# Altium PCB STM32F030C8T6.PcbDoc (part 2 of 2)
Units mil, origin at the board's own origin, x right, y up, seen from the top; angles counter-clockwise.
Board outline 2425 x 2425 mil, 2 copper layers (Top Layer, Bottom Layer); 23 components, 16 nets, 125 pads, 8 vias.
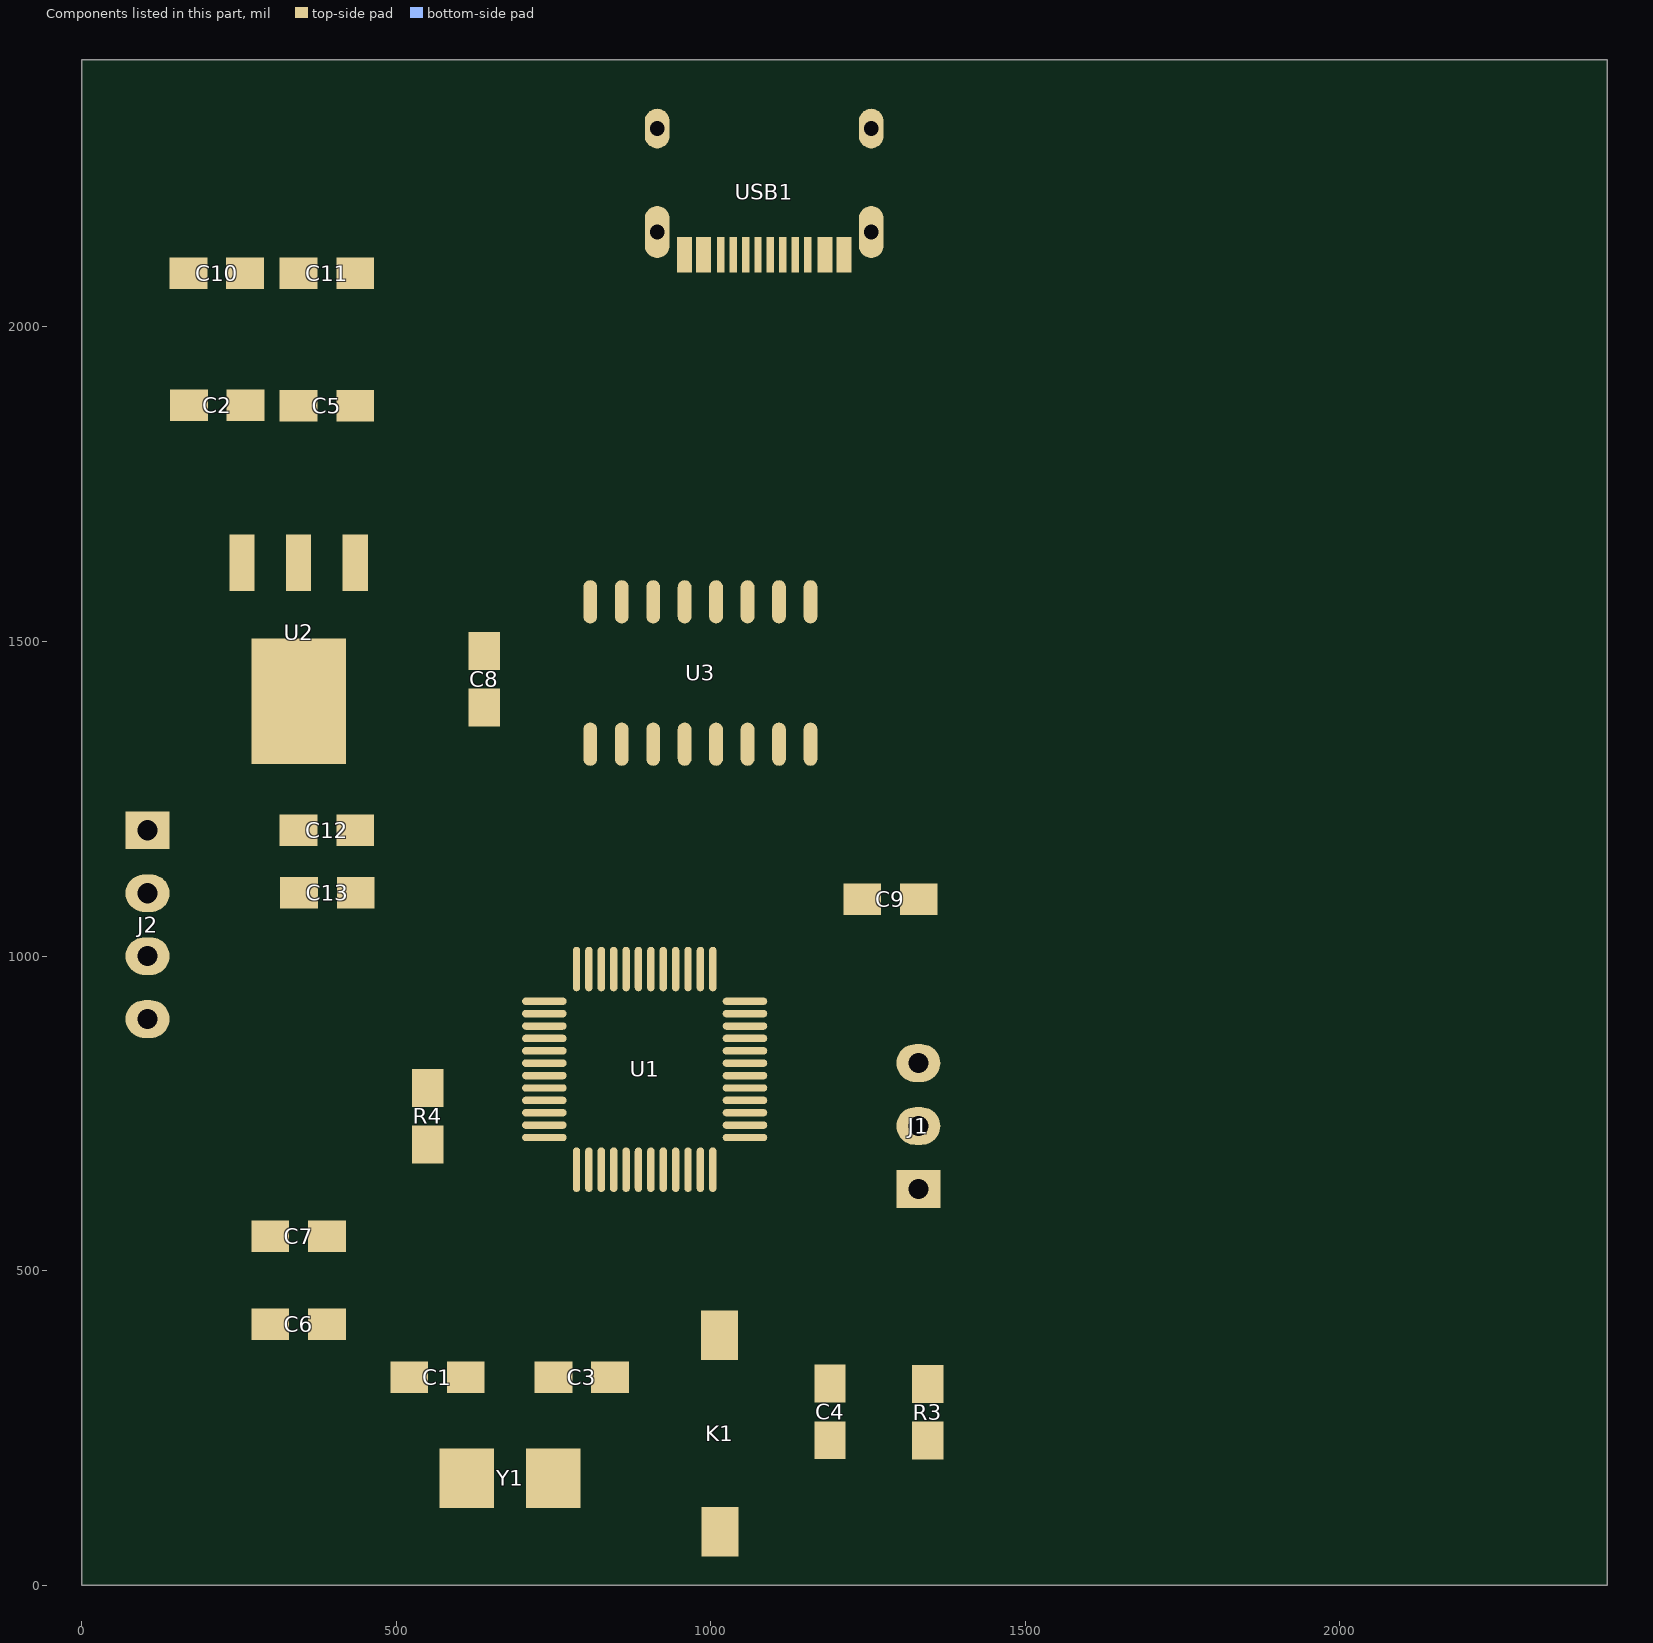
[diagram p2: the components of this part, seen from the top]

## Via types
v1: diameter 50, hole 28, Top Layer to Bottom Layer, 6 vias
v2: diameter 30, hole 20, Top Layer to Bottom Layer, 2 vias

## Nets (pads, with @x,y where several pads share a name; then routed paths per layer and width w, separated by ;. In a path a pad name is that pad's centre, name@x,y a point inside that pad or via, vN(x,y) a via of type N, cw(c..) or ccw(c..) an arc to the next point about the centre after c; other vN are vias at no path point) (continued)
copper on no net: | length 18886
  Top Layer w1: 1893,1101 1893,1104 ; 1893,1254 1893,1257 ; 1894,826 1894,852 ; 1894,1095 1894,1109 ; 1894,1251 1894,1259 ; 1894,1372 1894,1402 ; 1895,826 1895,858 ; 1895,1092 1895,1112 ; 1895,1118 1895,1121 ; 1895,1128 1895,1143 ; 1895,1251 1895,1260 ; 1895,1372 1895,1407 ; 1896,826 1896,861 ; 1896,1090 1896,1101 ; 1896,1105 1896,1114 ; 1896,1117 1896,1121 ; 1896,1128 1896,1143 ; 1896,1250 1896,1261 ; 1896,1372 1896,1409 ; 1897,831 1897,848 ; 1897,853 1897,864 ; 1897,1088 1897,1098 ; 1897,1108 1897,1121 ; 1897,1131 1897,1143 ; 1897,1250 1897,1261 ; 1897,1377 1897,1393 ; 1897,1397 1897,1411 ; 1898,832 1898,846 ; 1898,856 1898,865 ; 1898,1087 1898,1096 ; 1898,1110 1898,1121 ; 1898,1133 1898,1143 ; 1898,1250 1898,1261 ; 1898,1378 1898,1391 ; 1898,1399 1898,1412 ; 1899,832 1899,845 ; 1899,857 1899,867 ; 1899,1086 1899,1095 ; 1899,1111 1899,1121 ; 1899,1133 1899,1143 ; 1899,1250 1899,1261 ; 1899,1378 1899,1390 ; 1899,1400 1899,1413 ; 1900,833 1900,844 ; 1900,858 1900,868 ; 1900,1084 1900,1094 ; 1900,1112 1900,1121 ; 1900,1133 1900,1143 ; 1900,1250 1900,1261 ; 1900,1379 1900,1390 ; 1900,1401 1900,1414 ; 1901,833 1901,844 ; 1901,859 1901,869 ; 1901,1084 1901,1093 ; 1901,1113 1901,1121 ; 1901,1133 1901,1143 ; 1901,1250 1901,1261 ; 1901,1379 1901,1390 ; 1901,1402 1901,1414 ; 1902,833 1902,844 ; 1902,860 1902,870 ; 1902,1083 1902,1093 ; 1902,1114 1902,1121 ; 1902,1133 1902,1143 ; 1902,1251 1902,1260 ; 1902,1379 1902,1390 ; 1902,1402 1902,1415 ; 1903,833 1903,844 ; 1903,860 1903,871 ; 1903,1082 1903,1092 ; 1903,1115 1903,1121 ; 1903,1133 1903,1143 ; 1903,1252 1903,1259 ; 1903,1379 1903,1390 ; 1903,1403 1903,1415 ; 1904,833 1904,844 ; 1904,861 1904,872 ; 1904,1081 1904,1092 ; 1904,1116 1904,1121 ; 1904,1133 1904,1143 ; 1904,1254 1904,1257 ; 1904,1379 1904,1390 ; 1904,1403 1904,1415 ; 1905,833 1905,844 ; 1905,861 1905,872 ; 1905,1081 1905,1092 ; 1905,1116 1905,1121 ; 1905,1133 1905,1143 ; 1905,1340 1905,1348 ; 1905,1379 1905,1390 ; 1905,1403 1905,1415 ; 1906,833 1906,844 ; 1906,861 1906,873 ; 1906,1080 1906,1091 ; 1906,1117 1906,1121 ; 1906,1133 1906,1143 ; 1906,1339 1906,1349 ; 1906,1379 1906,1390 ; 1906,1403 1906,1415 ; 1907,833 1907,844 ; 1907,862 1907,874 ; 1907,1080 1907,1091 ; 1907,1117 1907,1121 ; 1907,1133 1907,1143 ; 1907,1338 1907,1349 ; 1907,1379 1907,1390 ; 1907,1403 1907,1415 ; 1908,833 1908,844 ; 1908,862 1908,874 ; 1908,1079 1908,1091 ; 1908,1118 1908,1121 ; 1908,1133 1908,1143 ; 1908,1338 1908,1341 ; 1908,1343 1908,1350 ; 1908,1379 1908,1390 ; 1908,1403 1908,1415 ; 1909,833 1909,844 ; 1909,862 1909,874 ; 1909,902 1909,908 ; 1909,930 1909,937 ; 1909,966 1909,976 ; 1909,1015 1909,1021 ; 1909,1033 1909,1040 ; 1909,1079 1909,1090 ; 1909,1118 1909,1121 ; 1909,1133 1909,1143 ; 1909,1150 1909,1156 ; 1909,1183 1909,1193 ; 1909,1222 1909,1229 ; 1909,1292 1909,1299 ; 1909,1326 1909,1335 ; 1909,1337 1909,1341 ; 1909,1342 1909,1350 ; 1909,1379 1909,1390 ; 1909,1403 1909,1415 ; 1909,1439 1909,1446 ; 1910,833 1910,844 ; 1910,863 1910,875 ; 1910,880 1910,895 ; 1910,900 1910,910 ; 1910,926 1910,940 ; 1910,962 1910,979 ; 1910,993 1910,1008 ; 1910,1012 1910,1023 ; 1910,1031 1910,1043 ; 1910,1079 1910,1090 ; 1910,1118 1910,1121 ; 1910,1133 1910,1143 ; 1910,1147 1910,1159 ; 1910,1179 1910,1197 ; 1910,1219 1910,1232 ; 1910,1236 1910,1239 ; 1910,1245 1910,1261 ; 1910,1269 1910,1284 ; 1910,1289 1910,1301 ; 1910,1322 1910,1340 ; 1910,1342 1910,1349 ; 1910,1379 1910,1390 ; 1910,1403 1910,1414 ; 1910,1435 1910,1450 ; 1910,1465 1910,1485 ; 1910,1489 1910,1503 ; 1911,833 1911,844 ; 1911,863 1911,875 ; 1911,880 1911,895 ; 1911,899 1911,910 ; 1911,924 1911,931 ; 1911,933 1911,942 ; 1911,960 1911,981 ; 1911,993 1911,1008 ; 1911,1011 1911,1025 ; 1911,1029 1911,1044 ; 1911,1078 1911,1090 ; 1911,1119 1911,1121 ; 1911,1133 1911,1143 ; 1911,1146 1911,1160 ; 1911,1177 1911,1199 ; 1911,1217 1911,1225 ; 1911,1226 1911,1239 ; 1911,1245 1911,1261 ; 1911,1269 1911,1284 ; 1911,1288 1911,1303 ; 1911,1320 1911,1340 ; 1911,1343 1911,1349 ; 1911,1379 1911,1390 ; 1911,1402 1911,1414 ; 1911,1433 1911,1441 ; 1911,1444 1911,1452 ; 1911,1465 1911,1485 ; 1911,1489 1911,1503 ; 1912,833 1912,844 ; 1912,863 1912,875 ; 1912,882 1912,895 ; 1912,898 1912,911 ; 1912,922 1912,929 ; 1912,935 1912,943 ; 1912,958 1912,964 ; 1912,971 1912,982 ; 1912,995 1912,1008 ; 1912,1010 1912,1014 ; 1912,1016 1912,1026 ; 1912,1028 1912,1034 ; 1912,1035 1912,1045 ; 1912,1078 1912,1090 ; 1912,1133 1912,1143 ; 1912,1145 1912,1149 ; 1912,1150 1912,1161 ; 1912,1176 1912,1181 ; 1912,1188 1912,1200 ; 1912,1215 1912,1222 ; 1912,1230 1912,1239 ; 1912,1247 1912,1261 ; 1912,1271 1912,1284 ; 1912,1286 1912,1292 ; 1912,1293 1912,1303 ; 1912,1319 1912,1327 ; 1912,1333 1912,1341 ; 1912,1344 1912,1347 ; 1912,1379 1912,1390 ; 1912,1402 1912,1413 ; 1912,1431 1912,1440 ; 1912,1446 1912,1454 ; 1912,1466 1912,1482 ; 1912,1492 1912,1501 ; 1913,833 1913,844 ; 1913,863 1913,875 ; 1913,884 1913,895 ; 1913,897 1913,901 ; 1913,902 1913,911 ; 1913,921 1913,928 ; 1913,936 1913,944 ; 1913,958 1913,963 ; 1913,972 1913,983 ; 1913,998 1913,1012 ; 1913,1017 1913,1026 ; 1913,1028 1913,1031 ; 1913,1036 1913,1046 ; 1913,1078 1913,1090 ; 1913,1133 1913,1147 ; 1913,1152 1913,1162 ; 1913,1175 1913,1180 ; 1913,1189 1913,1200 ; 1913,1214 1913,1221 ; 1913,1231 1913,1239 ; 1913,1249 1913,1261 ; 1913,1273 1913,1284 ; 1913,1285 1913,1289 ; 1913,1294 1913,1304 ; 1913,1318 1913,1326 ; 1913,1334 1913,1342 ; 1913,1379 1913,1390 ; 1913,1401 1913,1413 ; 1913,1430 1913,1439 ; 1913,1447 1913,1455 ; 1913,1468 1913,1481 ; 1913,1493 1913,1499 ; 1914,833 1914,844 ; 1914,863 1914,876 ; 1914,885 1914,895 ; 1914,897 1914,900 ; 1914,902 1914,911 ; 1914,920 1914,928 ; 1914,936 1914,945 ; 1914,957 1914,965 ; 1914,973 1914,984 ; 1914,998 1914,1011 ; 1914,1018 1914,1030 ; 1914,1037 1914,1046 ; 1914,1077 1914,1090 ; 1914,1133 1914,1146 ; 1914,1152 1914,1162 ; 1914,1174 1914,1182 ; 1914,1190 1914,1201 ; 1914,1213 1914,1220 ; 1914,1233 1914,1239 ; 1914,1250 1914,1261 ; 1914,1274 1914,1288 ; 1914,1295 1914,1304 ; 1914,1317 1914,1326 ; 1914,1334 1914,1343 ; 1914,1379 1914,1390 ; 1914,1399 1914,1411 ; 1914,1429 1914,1438 ; 1914,1447 1914,1456 ; 1914,1469 1914,1480 ; 1914,1494 1914,1498 ; 1915,833 1915,844 ; 1915,863 1915,876 ; 1915,885 1915,895 ; 1915,896 1915,899 ; 1915,902 1915,911 ; 1915,919 1915,927 ; 1915,936 1915,946 ; 1915,957 1915,966 ; 1915,973 1915,984 ; 1915,999 1915,1010 ; 1915,1018 1915,1029 ; 1915,1037 1915,1046 ; 1915,1077 1915,1090 ; 1915,1133 1915,1145 ; 1915,1153 1915,1163 ; 1915,1174 1915,1183 ; 1915,1191 1915,1201 ; 1915,1213 1915,1220 ; 1915,1233 1915,1239 ; 1915,1251 1915,1261 ; 1915,1274 1915,1287 ; 1915,1295 1915,1305 ; 1915,1316 1915,1325 ; 1915,1335 1915,1344 ; 1915,1379 1915,1390 ; 1915,1397 1915,1409 ; 1915,1428 1915,1437 ; 1915,1448 1915,1457 ; 1915,1469 1915,1480 ; 1915,1494 1915,1497 ; 1916,833 1916,844 ; 1916,863 1916,876 ; 1916,886 1916,895 ; 1916,896 1916,899 ; 1916,902 1916,911 ; 1916,918 1916,927 ; 1916,937 1916,946 ; 1916,956 1916,966 ; 1916,974 1916,984 ; 1916,999 1916,1010 ; 1916,1018 1916,1029 ; 1916,1037 1916,1047 ; 1916,1077 1916,1090 ; 1916,1133 1916,1145 ; 1916,1153 1916,1163 ; 1916,1174 1916,1184 ; 1916,1191 1916,1201 ; 1916,1212 1916,1220 ; 1916,1234 1916,1239 ; 1916,1251 1916,1261 ; 1916,1275 1916,1287 ; 1916,1295 1916,1305 ; 1916,1316 1916,1325 ; 1916,1335 1916,1344 ; 1916,1379 1916,1406 ; 1916,1427 1916,1437 ; 1916,1448 1916,1458 ; 1916,1470 1916,1481 ; 1916,1493 1916,1497 ; 1917,833 1917,844 ; 1917,863 1917,876 ; 1917,886 1917,898 ; 1917,902 1917,911 ; 1917,917 1917,927 ; 1917,937 1917,947 ; 1917,956 1917,966 ; 1917,974 1917,984 ; 1917,999 1917,1009 ; 1917,1018 1917,1028 ; 1917,1037 1917,1047 ; 1917,1077 1917,1090 ; 1917,1133 1917,1145 ; 1917,1153 1917,1163 ; 1917,1174 1917,1184 ; 1917,1191 1917,1202 ; 1917,1212 1917,1220 ; 1917,1235 1917,1239 ; 1917,1251 1917,1261 ; 1917,1275 1917,1286 ; 1917,1295 1917,1305 ; 1917,1316 1917,1325 ; 1917,1335 1917,1344 ; 1917,1379 1917,1406 ; 1917,1427 1917,1437 ; 1917,1449 1917,1458 ; 1917,1470 1917,1481 ; 1917,1493 1917,1496 ; 1918,833 1918,844 ; 1918,863 1918,876 ; 1918,886 1918,898 ; 1918,902 1918,911 ; 1918,917 1918,926 ; 1918,937 1918,947 ; 1918,956 1918,966 ; 1918,974 1918,984 ; 1918,999 1918,1009 ; 1918,1018 1918,1028 ; 1918,1037 1918,1047 ; 1918,1077 1918,1090 ; 1918,1133 1918,1144 ; 1918,1153 1918,1163 ; 1918,1174 1918,1184 ; 1918,1191 1918,1202 ; 1918,1212 1918,1221 ; 1918,1235 1918,1239 ; 1918,1251 1918,1261 ; 1918,1275 1918,1286 ; 1918,1295 1918,1305 ; 1918,1315 1918,1325 ; 1918,1335 1918,1345 ; 1918,1379 1918,1410 ; 1918,1426 1918,1436 ; 1918,1449 1918,1459 ; 1918,1470 1918,1481 ; 1918,1492 1918,1496 ; 1919,833 1919,844 ; 1919,863 1919,876 ; 1919,886 1919,897 ; 1919,903 1919,910 ; 1919,916 1919,926 ; 1919,937 1919,947 ; 1919,956 1919,966 ; 1919,974 1919,984 ; 1919,999 1919,1009 ; 1919,1018 1919,1028 ; 1919,1037 1919,1047 ; 1919,1077 1919,1090 ; 1919,1133 1919,1144 ; 1919,1153 1919,1163 ; 1919,1174 1919,1183 ; 1919,1191 1919,1202 ; 1919,1212 1919,1222 ; 1919,1236 1919,1239 ; 1919,1251 1919,1261 ; 1919,1275 1919,1286 ; 1919,1295 1919,1305 ; 1919,1315 1919,1325 ; 1919,1335 1919,1345 ; 1919,1379 1919,1390 ; 1919,1399 1919,1412 ; 1919,1426 1919,1436 ; 1919,1449 1919,1460 ; 1919,1471 1919,1482 ; 1919,1492 1919,1496 ; 1920,833 1920,844 ; 1920,863 1920,876 ; 1920,886 1920,897 ; 1920,916 1920,926 ; 1920,937 1920,948 ; 1920,957 1920,966 ; 1920,974 1920,984 ; 1920,999 1920,1009 ; 1920,1018 1920,1028 ; 1920,1037 1920,1047 ; 1920,1077 1920,1090 ; 1920,1133 1920,1144 ; 1920,1153 1920,1163 ; 1920,1174 1920,1183 ; 1920,1191 1920,1202 ; 1920,1212 1920,1225 ; 1920,1251 1920,1261 ; 1920,1275 1920,1285 ; 1920,1295 1920,1305 ; 1920,1315 1920,1325 ; 1920,1335 1920,1345 ; 1920,1379 1920,1390 ; 1920,1401 1920,1414 ; 1920,1425 1920,1436 ; 1920,1449 1920,1460 ; 1920,1471 1920,1482 ; 1920,1492 1920,1495 ; 1921,833 1921,844 ; 1921,863 1921,876 ; 1921,886 1921,897 ; 1921,916 1921,926 ; 1921,937 1921,948 ; 1921,958 1921,965 ; 1921,974 1921,984 ; 1921,999 1921,1008 ; 1921,1018 1921,1028 ; 1921,1037 1921,1047 ; 1921,1077 1921,1090 ; 1921,1133 1921,1144 ; 1921,1153 1921,1163 ; 1921,1175 1921,1183 ; 1921,1191 1921,1202 ; 1921,1212 1921,1229 ; 1921,1251 1921,1261 ; 1921,1275 1921,1285 ; 1921,1295 1921,1305 ; 1921,1315 1921,1325 ; 1921,1335 1921,1345 ; 1921,1379 1921,1390 ; 1921,1403 1921,1415 ; 1921,1425 1921,1436 ; 1921,1449 1921,1460 ; 1921,1472 1921,1483 ; 1921,1491 1921,1495 ; 1922,833 1922,844 ; 1922,863 1922,876 ; 1922,886 1922,896 ; 1922,915 1922,926 ; 1922,937 1922,948 ; 1922,959 1922,963 ; 1922,973 1922,984 ; 1922,999 1922,1008 ; 1922,1018 1922,1027 ; 1922,1037 1922,1047 ; 1922,1077 1922,1090 ; 1922,1133 1922,1143 ; 1922,1153 1922,1163 ; 1922,1177 1922,1181 ; 1922,1190 1922,1202 ; 1922,1212 1922,1233 ; 1922,1251 1922,1261 ; 1922,1275 1922,1285 ; 1922,1295 1922,1305 ; 1922,1315 1922,1325 ; 1922,1335 1922,1345 ; 1922,1379 1922,1390 ; 1922,1403 1922,1416 ; 1922,1425 1922,1436 ; 1922,1449 1922,1461 ; 1922,1472 1922,1483 ; 1922,1491 1922,1494 ; 1923,833 1923,844 ; 1923,863 1923,875 ; 1923,886 1923,896 ; 1923,915 1923,926 ; 1923,937 1923,948 ; 1923,969 1923,984 ; 1923,999 1923,1008 ; 1923,1018 1923,1027 ; 1923,1037 1923,1047 ; 1923,1077 1923,1090 ; 1923,1133 1923,1143 ; 1923,1153 1923,1163 ; 1923,1186 1923,1202 ; 1923,1212 1923,1235 ; 1923,1251 1923,1261 ; 1923,1275 1923,1285 ; 1923,1295 1923,1305 ; 1923,1316 1923,1325 ; 1923,1335 1923,1344 ; 1923,1379 1923,1390 ; 1923,1404 1923,1416 ; 1923,1424 1923,1436 ; 1923,1449 1923,1461 ; 1923,1473 1923,1483 ; 1923,1491 1923,1494 ; 1924,833 1924,844 ; 1924,863 1924,875 ; 1924,886 1924,896 ; 1924,915 1924,948 ; 1924,966 1924,984 ; 1924,999 1924,1008 ; 1924,1018 1924,1027 ; 1924,1037 1924,1047 ; 1924,1078 1924,1090 ; 1924,1120 1924,1123 ; 1924,1133 1924,1143 ; 1924,1153 1924,1163 ; 1924,1184 1924,1202 ; 1924,1212 1924,1237 ; 1924,1251 1924,1261 ; 1924,1275 1924,1285 ; 1924,1295 1924,1305 ; 1924,1316 1924,1325 ; 1924,1335 1924,1344 ; 1924,1379 1924,1390 ; 1924,1405 1924,1417 ; 1924,1424 1924,1436 ; 1924,1450 1924,1461 ; 1924,1473 1924,1484 ; 1924,1490 1924,1493 ; 1925,833 1925,844 ; 1925,863 1925,875 ; 1925,886 1925,896 ; 1925,915 1925,948 ; 1925,964 1925,984 ; 1925,999 1925,1008 ; 1925,1018 1925,1027 ; 1925,1037 1925,1047 ; 1925,1078 1925,1090 ; 1925,1120 1925,1123 ; 1925,1133 1925,1143 ; 1925,1153 1925,1163 ; 1925,1181 1925,1202 ; 1925,1213 1925,1238 ; 1925,1251 1925,1261 ; 1925,1275 1925,1285 ; 1925,1295 1925,1305 ; 1925,1317 1925,1325 ; 1925,1335 1925,1343 ; 1925,1379 1925,1390 ; 1925,1405 1925,1417 ; 1925,1424 1925,1436 ; 1925,1450 1925,1461 ; 1925,1473 1925,1484 ; 1925,1490 1925,1493 ; 1926,833 1926,844 ; 1926,863 1926,875 ; 1926,886 1926,896 ; 1926,915 1926,926 ; 1926,962 1926,971 ; 1926,974 1926,984 ; 1926,999 1926,1008 ; 1926,1018 1926,1027 ; 1926,1037 1926,1047 ; 1926,1078 1926,1090 ; 1926,1120 1926,1123 ; 1926,1133 1926,1143 ; 1926,1153 1926,1163 ; 1926,1179 1926,1188 ; 1926,1191 1926,1202 ; 1926,1214 1926,1239 ; 1926,1251 1926,1261 ; 1926,1275 1926,1285 ; 1926,1295 1926,1305 ; 1926,1317 1926,1326 ; 1926,1334 1926,1343 ; 1926,1379 1926,1390 ; 1926,1405 1926,1418 ; 1926,1424 1926,1436 ; 1926,1450 1926,1461 ; 1926,1474 1926,1485 ; 1926,1489 1926,1493 ; 1927,833 1927,844 ; 1927,862 1927,874 ; 1927,886 1927,896 ; 1927,915 1927,926 ; 1927,960 1927,969 ; 1927,974 1927,984 ; 1927,999 1927,1008 ; 1927,1018 1927,1027 ; 1927,1037 1927,1047 ; 1927,1078 1927,1090 ; 1927,1120 1927,1123 ; 1927,1133 1927,1143 ; 1927,1153 1927,1163 ; 1927,1177 1927,1186 ; 1927,1191 1927,1202 ; 1927,1215 1927,1240 ; 1927,1251 1927,1261 ; 1927,1275 1927,1285 ; 1927,1295 1927,1305 ; 1927,1319 1927,1327 ; 1927,1333 1927,1342 ; 1927,1379 1927,1390 ; 1927,1406 1927,1418 ; 1927,1424 1927,1436 ; 1927,1450 1927,1461 ; 1927,1474 1927,1485 ; 1927,1489 1927,1492 ; 1928,833 1928,844 ; 1928,862 1928,874 ; 1928,886 1928,896 ; 1928,915 1928,926 ; 1928,958 1928,968 ; 1928,974 1928,984 ; 1928,999 1928,1008 ; 1928,1018 1928,1027 ; 1928,1037 1928,1047 ; 1928,1079 1928,1091 ; 1928,1120 1928,1123 ; 1928,1133 1928,1143 ; 1928,1153 1928,1163 ; 1928,1176 1928,1185 ; 1928,1191 1928,1202 ; 1928,1216 1928,1240 ; 1928,1251 1928,1261 ; 1928,1275 1928,1285 ; 1928,1295 1928,1305 ; 1928,1320 1928,1328 ; 1928,1332 1928,1341 ; 1928,1379 1928,1390 ; 1928,1406 1928,1418 ; 1928,1424 1928,1436 ; 1928,1450 1928,1461 ; 1928,1475 1928,1485 ; 1928,1489 1928,1492 ; 1929,833 1929,844 ; 1929,862 1929,874 ; 1929,886 1929,895 ; 1929,915 1929,926 ; 1929,957 1929,967 ; 1929,974 1929,984 ; 1929,999 1929,1008 ; 1929,1018 1929,1027 ; 1929,1037 1929,1047 ; 1929,1079 1929,1091 ; 1929,1119 1929,1123 ; 1929,1133 1929,1143 ; 1929,1153 1929,1163 ; 1929,1174 1929,1184 ; 1929,1191 1929,1202 ; 1929,1218 1929,1241 ; 1929,1251 1929,1261 ; 1929,1275 1929,1285 ; 1929,1295 1929,1305 ; 1929,1321 1929,1339 ; 1929,1379 1929,1390 ; 1929,1406 1929,1418 ; 1929,1424 1929,1436 ; 1929,1449 1929,1461 ; 1929,1475 1929,1486 ; 1929,1488 1929,1491 ; 1930,833 1930,844 ; 1930,862 1930,873 ; 1930,886 1930,895 ; 1930,915 1930,926 ; 1930,956 1930,966 ; 1930,974 1930,984 ; 1930,999 1930,1008 ; 1930,1018 1930,1027 ; 1930,1037 1930,1047 ; 1930,1080 1930,1091 ; 1930,1119 1930,1122 ; 1930,1133 1930,1143 ; 1930,1153 1930,1163 ; 1930,1173 1930,1183 ; 1930,1191 1930,1202 ; 1930,1221 1930,1241 ; 1930,1251 1930,1261 ; 1930,1275 1930,1285 ; 1930,1295 1930,1305 ; 1930,1318 1930,1336 ; 1930,1379 1930,1390 ; 1930,1406 1930,1418 ; 1930,1425 1930,1436 ; 1930,1449 1930,1461 ; 1930,1476 1930,1486 ; 1930,1488 1930,1491 ; 1931,833 1931,844 ; 1931,861 1931,873 ; 1931,886 1931,895 ; 1931,915 1931,926 ; 1931,955 1931,965 ; 1931,974 1931,984 ; 1931,999 1931,1008 ; 1931,1018 1931,1027 ; 1931,1037 1931,1047 ; 1931,1080 1931,1092 ; 1931,1119 1931,1122 ; 1931,1133 1931,1143 ; 1931,1153 1931,1163 ; 1931,1172 1931,1183 ; 1931,1191 1931,1202 ; 1931,1212 1931,1214 ; 1931,1225 1931,1241 ; 1931,1251 1931,1261 ; 1931,1275 1931,1285 ; 1931,1295 1931,1305 ; 1931,1317 1931,1322 ; 1931,1379 1931,1390 ; 1931,1406 1931,1418 ; 1931,1425 1931,1436 ; 1931,1449 1931,1460 ; 1931,1476 1931,1491 ; 1932,833 1932,844 ; 1932,861 1932,872 ; 1932,886 1932,895 ; 1932,916 1932,926 ; 1932,954 1932,965 ; 1932,974 1932,984 ; 1932,999 1932,1008 ; 1932,1018 1932,1027 ; 1932,1037 1932,1047 ; 1932,1081 1932,1092 ; 1932,1118 1932,1122 ; 1932,1133 1932,1143 ; 1932,1153 1932,1163 ; 1932,1172 1932,1182 ; 1932,1191 1932,1202 ; 1932,1212 1932,1215 ; 1932,1229 1932,1241 ; 1932,1251 1932,1261 ; 1932,1275 1932,1285 ; 1932,1295 1932,1305 ; 1932,1316 1932,1322 ; 1932,1379 1932,1390 ; 1932,1406 1932,1418 ; 1932,1425 1932,1436 ; 1932,1449 1932,1460 ; 1932,1476 1932,1490 ; 1933,833 1933,844 ; 1933,861 1933,871 ; 1933,886 1933,895 ; 1933,916 1933,927 ; 1933,954 1933,965 ; 1933,974 1933,984 ; 1933,999 1933,1008 ; 1933,1018 1933,1027 ; 1933,1037 1933,1047 ; 1933,1081 1933,1092 ; 1933,1118 1933,1121 ; 1933,1133 1933,1143 ; 1933,1153 1933,1163 ; 1933,1171 1933,1182 ; 1933,1191 1933,1202 ; 1933,1212 1933,1215 ; 1933,1231 1933,1241 ; 1933,1251 1933,1261 ; 1933,1275 1933,1285 ; 1933,1295 1933,1305 ; 1933,1315 1933,1323 ; 1933,1379 1933,1390 ; 1933,1406 1933,1417 ; 1933,1426 1933,1436 ; 1933,1449 1933,1460 ; 1933,1477 1933,1490 ; 1934,833 1934,844 ; 1934,860 1934,871 ; 1934,886 1934,895 ; 1934,917 1934,927 ; 1934,946 1934,947 ; 1934,954 1934,964 ; 1934,974 1934,984 ; 1934,999 1934,1008 ; 1934,1018 1934,1027 ; 1934,1037 1934,1047 ; 1934,1082 1934,1093 ; 1934,1117 1934,1121 ; 1934,1133 1934,1143 ; 1934,1153 1934,1163 ; 1934,1171 1934,1182 ; 1934,1191 1934,1202 ; 1934,1212 1934,1216 ; 1934,1232 1934,1241 ; 1934,1251 1934,1261 ; 1934,1275 1934,1285 ; 1934,1295 1934,1305 ; 1934,1315 1934,1328 ; 1934,1379 1934,1390 ; 1934,1405 1934,1417 ; 1934,1426 1934,1436 ; 1934,1449 1934,1459 ; 1934,1477 1934,1489 ; 1935,833 1935,844 ; 1935,859 1935,870 ; 1935,886 1935,895 ; 1935,917 1935,927 ; 1935,945 1935,948 ; 1935,954 1935,964 ; 1935,974 1935,984 ; 1935,989 1935,991 ; 1935,999 1935,1008 ; 1935,1018 1935,1027 ; 1935,1037 1935,1047 ; 1935,1083 1935,1094 ; 1935,1117 1935,1120 ; 1935,1133 1935,1143 ; 1935,1153 1935,1163 ; 1935,1171 1935,1182 ; 1935,1191 1935,1202 ; 1935,1207 1935,1209 ; 1935,1212 1935,1216 ; 1935,1233 1935,1241 ; 1935,1251 1935,1261 ; 1935,1275 1935,1285 ; 1935,1295 1935,1305 ; 1935,1315 1935,1338 ; 1935,1379 1935,1390 ; 1935,1405 1935,1417 ; 1935,1427 1935,1437 ; 1935,1448 1935,1459 ; 1935,1478 1935,1489 ; 1936,833 1936,844 ; 1936,859 1936,869 ; 1936,886 1936,895 ; 1936,918 1936,928 ; 1936,944 1936,948 ; 1936,954 1936,965 ; 1936,974 1936,984 ; 1936,989 1936,991 ; 1936,999 1936,1008 ; 1936,1018 1936,1028 ; 1936,1037 1936,1047 ; 1936,1083 1936,1094 ; 1936,1116 1936,1120 ; 1936,1133 1936,1143 ; 1936,1153 1936,1163 ; 1936,1171 1936,1182 ; 1936,1191 1936,1202 ; 1936,1206 1936,1209 ; 1936,1212 1936,1217 ; 1936,1233 1936,1240 ; 1936,1251 1936,1261 ; 1936,1275 1936,1285 ; 1936,1295 1936,1305 ; 1936,1315 1936,1342 ; 1936,1379 1936,1390 ; 1936,1404 1936,1416 ; 1936,1427 1936,1437 ; 1936,1448 1936,1458 ; 1936,1478 1936,1489 ; 1937,833 1937,844 ; 1937,858 1937,868 ; 1937,886 1937,896 ; 1937,919 1937,928 ; 1937,943 1937,947 ; 1937,954 1937,965 ; 1937,973 1937,985 ; 1937,989 1937,991 ; 1937,999 1937,1008 ; 1937,1018 1937,1028 ; 1937,1037 1937,1047 ; 1937,1085 1937,1095 ; 1937,1115 1937,1119 ; 1937,1133 1937,1143 ; 1937,1153 1937,1163 ; 1937,1171 1937,1182 ; 1937,1191 1937,1202 ; 1937,1206 1937,1209 ; 1937,1212 1937,1218 ; 1937,1233 1937,1240 ; 1937,1251 1937,1261 ; 1937,1275 1937,1285 ; 1937,1295 1937,1305 ; 1937,1316 1937,1344 ; 1937,1379 1937,1390 ; 1937,1403 1937,1415 ; 1937,1428 1937,1437 ; 1937,1448 1937,1457 ; 1937,1478 1937,1488 ; 1938,832 1938,845 ; 1938,856 1938,866 ; 1938,885 1938,896 ; 1938,919 1938,929 ; 1938,942 1938,946 ; 1938,954 1938,965 ; 1938,973 1938,985 ; 1938,988 1938,991 ; 1938,999 1938,1009 ; 1938,1018 1938,1028 ; 1938,1037 1938,1047 ; 1938,1086 1938,1097 ; 1938,1113 1938,1118 ; 1938,1133 1938,1144 ; 1938,1153 1938,1163 ; 1938,1171 1938,1183 ; 1938,1190 1938,1202 ; 1938,1206 1938,1209 ; 1938,1212 1938,1219 ; 1938,1233 1938,1239 ; 1938,1251 1938,1261 ; 1938,1274 1938,1285 ; 1938,1295 1938,1305 ; 1938,1316 1938,1346 ; 1938,1378 1938,1391 ; 1938,1402 1938,1415 ; 1938,1429 1938,1438 ; 1938,1447 1938,1456 ; 1938,1479 1938,1488 ; 1939,831 1939,846 ; 1939,854 1939,865 ; 1939,884 1939,897 ; 1939,921 1939,930 ; 1939,940 1939,945 ; 1939,954 1939,966 ; 1939,972 1939,986 ; 1939,987 1939,991 ; 1939,998 1939,1010 ; 1939,1018 1939,1029 ; 1939,1037 1939,1048 ; 1939,1087 1939,1098 ; 1939,1112 1939,1117 ; 1939,1132 1939,1144 ; 1939,1153 1939,1164 ; 1939,1172 1939,1184 ; 1939,1189 1939,1203 ; 1939,1205 1939,1208 ; 1939,1212 1939,1220 ; 1939,1232 1939,1239 ; 1939,1250 1939,1262 ; 1939,1273 1939,1286 ; 1939,1295 1939,1306 ; 1939,1318 1939,1347 ; 1939,1377 1939,1392 ; 1939,1400 1939,1413 ; 1939,1430 1939,1439 ; 1939,1447 1939,1455 ; 1939,1479 1939,1487 ; 1940,829 1940,863 ; 1940,883 1940,898 ; 1940,922 1940,932 ; 1940,938 1940,944 ; 1940,955 1940,968 ; 1940,970 1940,974 ; 1940,976 1940,990 ; 1940,996 1940,1011 ; 1940,1018 1940,1030 ; 1940,1037 1940,1049 ; 1940,1089 1940,1101 ; 1940,1109 1940,1116 ; 1940,1130 1940,1146 ; 1940,1153 1940,1166 ; 1940,1172 1940,1186 ; 1940,1187 1940,1192 ; 1940,1193 1940,1208 ; 1940,1212 1940,1221 ; 1940,1231 1940,1237 ; 1940,1248 1940,1264 ; 1940,1272 1940,1287 ; 1940,1295 1940,1308 ; 1940,1321 1940,1347 ; 1940,1375 1940,1412 ; 1940,1431 1940,1439 ; 1940,1446 1940,1454 ; 1940,1480 1940,1487 ; 1941,826 1941,860 ; 1941,880 1941,902 ; 1941,924 1941,943 ; 1941,956 1941,973 ; 1941,976 1941,990 ; 1941,993 1941,1014 ; 1941,1018 1941,1032 ; 1941,1037 1941,1052 ; 1941,1091 1941,1114 ; 1941,1128 1941,1148 ; 1941,1153 1941,1168 ; 1941,1173 1941,1190 ; 1941,1194 1941,1207 ; 1941,1212 1941,1225 ; 1941,1227 1941,1236 ; 1941,1245 1941,1267 ; 1941,1269 1941,1290 ; 1941,1295 1941,1310 ; 1941,1319 1941,1348 ; 1941,1372 1941,1410 ; 1941,1433 1941,1441 ; 1941,1444 1941,1452 ; 1941,1480 1941,1486 ; 1942,826 1942,857 ; 1942,880 1942,902 ; 1942,926 1942,941 ; 1942,958 1942,971 ; 1942,978 1942,988 ; 1942,993 1942,1014 ; 1942,1018 1942,1032 ; 1942,1037 1942,1052 ; 1942,1094 1942,1111 ; 1942,1128 1942,1148 ; 1942,1153 1942,1168 ; 1942,1175 1942,1188 ; 1942,1195 1942,1205 ; 1942,1212 1942,1215 ; 1942,1218 1942,1233 ; 1942,1245 1942,1267 ; 1942,1269 1942,1290 ; 1942,1295 1942,1310 ; 1942,1316 1942,1348 ; 1942,1372 1942,1407 ; 1942,1436 1942,1449 ; 1942,1481 1942,1486 ; 1943,932 1943,936 ; 1943,963 1943,966 ; 1943,981 1943,984 ; 1943,1102 1943,1104 ; 1943,1180 1943,1184 ; 1943,1198 1943,1201 ; 1943,1225 1943,1228 ; 1943,1314 1943,1323 ; 1943,1335 1943,1348 ; 1943,1442 1943,1444 ; 1943,1481 1943,1486 ; 1944,1314 1944,1322 ; 1944,1337 1944,1348 ; 1944,1467 1944,1474 ; 1944,1481 1944,1485 ; 1945,1313 1945,1321 ; 1945,1338 1945,1348 ; 1945,1466 1945,1475 ; 1945,1481 1945,1485 ; 1946,1313 1946,1321 ; 1946,1339 1946,1348 ; 1946,1466 1946,1475 ; 1946,1481 1946,1484 ; 1947,1313 1947,1321 ; 1947,1339 1947,1347 ; 1947,1465 1947,1475 ; 1947,1480 1947,1484 ; 1948,1313 1948,1321 ; 1948,1339 1948,1347 ; 1948,1465 1948,1475 ; 1948,1480 1948,1483 ; 1949,1314 1949,1322 ; 1949,1338 1949,1346 ; 1949,1465 1949,1475 ; 1949,1479 1949,1483 ; 1950,1314 1950,1323 ; 1950,1337 1950,1345 ; 1950,1465 1950,1475 ; 1950,1478 1950,1482 ; 1951,1315 1951,1324 ; 1951,1336 1951,1344 ; 1951,1466 1951,1474 ; 1951,1477 1951,1481 ; 1952,1317 1952,1328 ; 1952,1333 1952,1343 ; 1952,1466 1952,1474 ; 1952,1475 1952,1481 ; 1953,1319 1953,1341 ; 1953,1467 1953,1480 ; 1954,1322 1954,1337 ; 1954,1468 1954,1478 ; 1955,1471 1955,1475 ; 1972,1042 1972,1044 ; 1973,1019 1973,1021 ; 1973,1042 1973,1046 ; 1974,1019 1974,1022 ; 1974,1042 1974,1046 ; 1975,1019 1975,1022 ; 1975,1042 1975,1047 ; 1975,1167 1975,1168 ; 1976,1019 1976,1022 ; 1976,1042 1976,1048 ; 1976,1168 1976,1171 ; 1977,1019 1977,1022 ; 1977,1043 1977,1048 ; 1977,1169 1977,1173 ; 1978,1019 1978,1023 ; 1978,1043 1978,1048 ; 1978,1170 1978,1175 ; 1978,1291 1978,1295 ; 1978,1368 1978,1372 ; 1979,959 1979,961 ; 1979,1019 1979,1023 ; 1979,1043 1979,1048 ; 1979,1170 1979,1176 ; 1979,1290 1979,1295 ; 1979,1367 1979,1372 ; 1980,956 1980,963 ; 1980,1019 1980,1023 ; 1980,1043 1980,1048 ; 1980,1172 1980,1177 ; 1980,1290 1980,1295 ; 1980,1367 1980,1373 ; 1981,955 1981,964 ; 1981,1019 1981,1023 ; 1981,1043 1981,1048 ; 1981,1103 1981,1105 ; 1981,1172 1981,1177 ; 1981,1289 1981,1295 ; 1981,1367 1981,1372 ; 1982,955 1982,964 ; 1982,1019 1982,1023 ; 1982,1024 1982,1028 ; 1982,1043 1982,1048 ; 1982,1103 1982,1106 ; 1982,1172 1982,1178 ; 1982,1187 1982,1198 ; 1982,1289 1982,1295 ; 1982,1366 1982,1373 ; 1983,954 1983,964 ; 1983,1018 1983,1029 ; 1983,1043 1983,1049 ; 1983,1103 1983,1108 ; 1983,1172 1983,1178 ; 1983,1181 1983,1198 ; 1983,1289 1983,1296 ; 1983,1298 1983,1303 ; 1983,1366 1983,1373 ; 1983,1375 1983,1381 ; 1984,954 1984,964 ; 1984,1018 1984,1029 ; 1984,1043 1984,1053 ; 1984,1105 1984,1111 ; 1984,1172 1984,1199 ; 1984,1288 1984,1303 ; 1984,1366 1984,1381 ; 1985,953 1985,964 ; 1985,1017 1985,1029 ; 1985,1043 1985,1054 ; 1985,1106 1985,1112 ; 1985,1172 1985,1199 ; 1985,1288 1985,1304 ; 1985,1365 1985,1381 ; 1986,953 1986,962 ; 1986,1014 1986,1029 ; 1986,1043 1986,1054 ; 1986,1106 1986,1113 ; 1986,1172 1986,1198 ; 1986,1284 1986,1302 ; 1986,1362 1986,1380 ; 1987,952 1987,961 ; 1987,999 1987,1001 ; 1987,1011 1987,1027 ; 1987,1042 1987,1054 ; 1987,1106 1987,1113 ; 1987,1172 1987,1197 ; 1987,1272 1987,1274 ; 1987,1280 1987,1300 ; 1987,1349 1987,1351 ; 1987,1358 1987,1377 ; 1988,952 1988,960 ; 1988,1000 1988,1005 ; 1988,1007 1988,1025 ; 1988,1040 1988,1053 ; 1988,1107 1988,1113 ; 1988,1173 1988,1187 ; 1988,1191 1988,1196 ; 1988,1272 1988,1296 ; 1988,1350 1988,1373 ; 1989,951 1989,959 ; 1989,963 1989,973 ; 1989,999 1989,1023 ; 1989,1037 1989,1052 ; 1989,1107 1989,1114 ; 1989,1174 1989,1182 ; 1989,1191 1989,1197 ; 1989,1273 1989,1294 ; 1989,1350 1989,1372 ; 1990,950 1990,974 ; 1990,1000 1990,1023 ; 1990,1034 1990,1049 ; 1990,1107 1990,1114 ; 1990,1176 1990,1177 ; 1990,1191 1990,1197 ; 1990,1274 1990,1294 ; 1990,1351 1990,1371 ; 1991,948 1991,975 ; 1991,1001 1991,1015 ; 1991,1018 1991,1023 ; 1991,1031 1991,1048 ; 1991,1107 1991,1114 ; 1991,1191 1991,1197 ; 1991,1275 1991,1284 ; 1991,1288 1991,1294 ; 1991,1352 1991,1361 ; 1991,1365 1991,1371 ; 1992,947 1992,975 ; 1992,1003 1992,1013 ; 1992,1018 1992,1022 ; 1992,1028 1992,1048 ; 1992,1107 1992,1115 ; 1992,1191 1992,1197 ; 1992,1288 1992,1293 ; 1992,1365 1992,1371 ; 1993,946 1993,975 ; 1993,1005 1993,1009 ; 1993,1018 1993,1023 ; 1993,1028 1993,1048 ; 1993,1108 1993,1114 ; 1993,1191 1993,1197 ; 1993,1288 1993,1293 ; 1993,1365 1993,1370 ; 1994,929 1994,934 ; 1994,945 1994,974 ; 1994,1018 1994,1023 ; 1994,1028 1994,1048 ; 1994,1108 1994,1115 ; 1994,1177 1994,1179 ; 1994,1191 1994,1198 ; 1994,1287 1994,1293 ; 1994,1365 1994,1370 ; 1995,929 1995,940 ; 1995,947 1995,950 ; 1995,952 1995,958 ; 1995,963 1995,973 ; 1995,1017 1995,1023 ; 1995,1028 1995,1035 ; 1995,1038 1995,1048 ; 1995,1108 1995,1129 ; 1995,1177 1995,1180 ; 1995,1192 1995,1198 ; 1995,1287 1995,1292 ; 1995,1364 1995,1369 ; 1995,1371 1995,1372 ; 1996,930 1996,943 ; 1996,952 1996,957 ; 1996,963 1996,972 ; 1996,1016 1996,1022 ; 1996,1037 1996,1048 ; 1996,1108 1996,1134 ; 1996,1177 1996,1181 ; 1996,1192 1996,1198 ; 1996,1287 1996,1292 ; 1996,1294 1996,1296 ; 1996,1305 1996,1316 ; 1996,1364 1996,1369 ; 1996,1371 1996,1373 ; 1996,1382 1996,1394 ; 1997,930 1997,944 ; 1997,952 1997,957 ; 1997,962 1997,971 ; 1997,1015 1997,1022 ; 1997,1037 1997,1049 ; 1997,1108 1997,1116 ; 1997,1123 1997,1135 ; 1997,1177 1997,1182 ; 1997,1192 1997,1201 ; 1997,1286 1997,1291 ; 1997,1294 1997,1300 ; 1997,1301 1997,1318 ; 1997,1363 1997,1369 ; 1997,1371 1997,1377 ; 1997,1378 1997,1395 ; 1998,931 1998,944 ; 1998,952 1998,957 ; 1998,961 1998,970 ; 1998,1014 1998,1022 ; 1998,1036 1998,1052 ; 1998,1108 1998,1115 ; 1998,1126 1998,1135 ; 1998,1177 1998,1182 ; 1998,1191 1998,1201 ; 1998,1285 1998,1291 ; 1998,1294 1998,1319 ; 1998,1363 1998,1368 ; 1998,1371 1998,1396 ; 1999,932 1999,942 ; 1999,952 1999,957 ; 1999,960 1999,969 ; 1999,1013 1999,1022 ; 1999,1035 1999,1054 ; 1999,1091 1999,1094 ; 1999,1108 1999,1115 ; 1999,1122 1999,1125 ; 1999,1128 1999,1135 ; 1999,1177 1999,1182 ; 1999,1189 1999,1202 ; 1999,1285 1999,1290 ; 1999,1293 1999,1305 ; 1999,1315 1999,1320 ; 1999,1362 1999,1368 ; 1999,1370 1999,1383 ; 1999,1392 1999,1397 ; 2000,952 2000,957 ; 2000,959 2000,968 ; 2000,1012 2000,1023 ; 2000,1034 2000,1057 ; 2000,1090 2000,1094 ; 2000,1108 2000,1115 ; 2000,1122 2000,1125 ; 2000,1129 2000,1135 ; 2000,1177 2000,1183 ; 2000,1185 2000,1202 ; 2000,1273 2000,1274 ; 2000,1283 2000,1301 ; 2000,1316 2000,1320 ; 2000,1361 2000,1379 ; 2000,1393 2000,1398 ; 2001,952 2001,967 ; 2001,1012 2001,1026 ; 2001,1034 2001,1059 ; 2001,1089 2001,1094 ; 2001,1108 2001,1115 ; 2001,1121 2001,1125 ; 2001,1130 2001,1133 ; 2001,1177 2001,1200 ; 2001,1273 2001,1276 ; 2001,1282 2001,1300 ; 2001,1316 2001,1321 ; 2001,1350 2001,1354 ; 2001,1359 2001,1377 ; 2001,1394 2001,1398 ; 2002,952 2002,966 ; 2002,1011 2002,1028 ; 2002,1033 2002,1062 ; 2002,1088 2002,1094 ; 2002,1108 2002,1115 ; 2002,1121 2002,1125 ; 2002,1176 2002,1201 ; 2002,1276 2002,1299 ; 2002,1317 2002,1321 ; 2002,1354 2002,1376 ; 2002,1394 2002,1399 ; 2003,952 2003,965 ; 2003,1010 2003,1028 ; 2003,1032 2003,1040 ; 2003,1042 2003,1064 ; 2003,1088 2003,1094 ; 2003,1108 2003,1114 ; 2003,1120 2003,1125 ; 2003,1176 2003,1198 ; 2003,1201 2003,1202 ; 2003,1268 2003,1271 ; 2003,1275 2003,1298 ; 2003,1317 2003,1322 ; 2003,1345 2003,1348 ; 2003,1352 2003,1376 ; 2003,1394 2003,1399 ; 2004,952 2004,964 ; 2004,1009 2004,1028 ; 2004,1031 2004,1039 ; 2004,1042 2004,1048 ; 2004,1050 2004,1068 ; 2004,1088 2004,1093 ; 2004,1108 2004,1114 ; 2004,1119 2004,1125 ; 2004,1176 2004,1189 ; 2004,1192 2004,1198 ; 2004,1202 2004,1204 ; 2004,1268 2004,1272 ; 2004,1276 2004,1298 ; 2004,1317 2004,1322 ; 2004,1345 2004,1350 ; 2004,1353 2004,1375 ; 2004,1394 2004,1399 ; 2005,952 2005,962 ; 2005,1008 2005,1016 ; 2005,1017 2005,1027 ; 2005,1030 2005,1038 ; 2005,1042 2005,1047 ; 2005,1051 2005,1069 ; 2005,1088 2005,1093 ; 2005,1108 2005,1114 ; 2005,1118 2005,1125 ; 2005,1176 2005,1182 ; 2005,1192 2005,1198 ; 2005,1203 2005,1206 ; 2005,1268 2005,1273 ; 2005,1282 2005,1297 ; 2005,1317 2005,1322 ; 2005,1345 2005,1350 ; 2005,1360 2005,1374 ; 2005,1394 2005,1399 ; 2006,930 2006,936 ; 2006,952 2006,961 ; 2006,1006 2006,1015 ; 2006,1017 2006,1021 ; 2006,1029 2006,1037 ; 2006,1042 2006,1047 ; 2006,1053 2006,1069 ; 2006,1088 2006,1093 ; 2006,1108 2006,1114 ; 2006,1117 2006,1125 ; 2006,1176 2006,1182 ; 2006,1192 2006,1198 ; 2006,1205 2006,1209 ; 2006,1268 2006,1273 ; 2006,1283 2006,1296 ; 2006,1316 2006,1322 ; 2006,1345 2006,1351 ; 2006,1360 2006,1373 ; 2006,1394 2006,1399 ; 2007,929 2007,938 ; 2007,952 2007,960 ; 2007,1005 2007,1014 ; 2007,1017 2007,1021 ; 2007,1028 2007,1036 ; 2007,1042 2007,1047 ; 2007,1053 2007,1067 ; 2007,1088 2007,1094 ; 2007,1107 2007,1114 ; 2007,1116 2007,1125 ; 2007,1176 2007,1182 ; 2007,1192 2007,1198 ; 2007,1206 2007,1216 ; 2007,1268 2007,1274 ; 2007,1283 2007,1295 ; 2007,1316 2007,1322 ; 2007,1346 2007,1351 ; 2007,1361 2007,1373 ; 2007,1393 2007,1399 ; 2008,929 2008,940 ; 2008,952 2008,958 ; 2008,968 2008,976 ; 2008,1003 2008,1013 ; 2008,1017 2008,1021 ; 2008,1027 2008,1035 ; 2008,1042 2008,1047 ; 2008,1053 2008,1055 ; 2008,1088 2008,1094 ; 2008,1107 2008,1114 ; 2008,1116 2008,1124 ; 2008,1176 2008,1182 ; 2008,1192 2008,1199 ; 2008,1208 2008,1217 ; 2008,1268 2008,1274 ; 2008,1284 2008,1296 ; 2008,1316 2008,1322 ; 2008,1346 2008,1351 ; 2008,1361 2008,1373 ; 2008,1393 2008,1399 ; 2009,930 2009,940 ; 2009,952 2009,957 ; 2009,964 2009,978 ; 2009,1003 2009,1011 ; 2009,1017 2009,1021 ; 2009,1026 2009,1034 ; 2009,1042 2009,1047 ; 2009,1089 2009,1094 ; 2009,1107 2009,1114 ; 2009,1115 2009,1124 ; 2009,1176 2009,1182 ; 2009,1192 2009,1199 ; 2009,1209 2009,1218 ; 2009,1268 2009,1274 ; 2009,1284 2009,1297 ; 2009,1316 2009,1321 ; 2009,1346 2009,1351 ; 2009,1362 2009,1374 ; 2009,1393 2009,1399 ; 2010,931 2010,940 ; 2010,952 2010,957 ; 2010,960 2010,979 ; 2010,1004 2010,1010 ; 2010,1017 2010,1021 ; 2010,1025 2010,1034 ; 2010,1041 2010,1047 ; 2010,1090 2010,1095 ; 2010,1107 2010,1123 ; 2010,1175 2010,1181 ; 2010,1192 2010,1199 ; 2010,1205 2010,1218 ; 2010,1268 2010,1274 ; 2010,1284 2010,1301 ; 2010,1315 2010,1321 ; 2010,1346 2010,1351 ; 2010,1361 2010,1379 ; 2010,1393 2010,1399 ; 2011,934 2011,940 ; 2011,952 2011,980 ; 2011,1004 2011,1008 ; 2011,1016 2011,1021 ; 2011,1025 2011,1035 ; 2011,1041 2011,1047 ; 2011,1091 2011,1096 ; 2011,1107 2011,1123 ; 2011,1175 2011,1182 ; 2011,1192 2011,1217 ; 2011,1269 2011,1274 ; 2011,1282 2011,1302 ; 2011,1315 2011,1321 ; 2011,1346 2011,1351 ; 2011,1360 2011,1379 ; 2011,1392 2011,1398 ; 2012,934 2012,940 ; 2012,952 2012,980 ; 2012,1016 2012,1021 ; 2012,1025 2012,1036 ; 2012,1041 2012,1047 ; 2012,1092 2012,1096 ; 2012,1107 2012,1122 ; 2012,1176 2012,1182 ; 2012,1191 2012,1216 ; 2012,1269 2012,1274 ; 2012,1281 2012,1301 ; 2012,1315 2012,1321 ; 2012,1346 2012,1351 ; 2012,1358 2012,1379 ; 2012,1392 2012,1398 ; 2013,934 2013,940 ; 2013,952 2013,957 ; 2013,958 2013,979 ; 2013,1016 2013,1021 ; 2013,1025 2013,1036 ; 2013,1041 2013,1047 ; 2013,1106 2013,1121 ; 2013,1176 2013,1182 ; 2013,1190 2013,1214 ; 2013,1269 2013,1274 ; 2013,1280 2013,1299 ; 2013,1314 2013,1321 ; 2013,1346 2013,1351 ; 2013,1357 2013,1377 ; 2013,1392 2013,1398 ; 2014,933 2014,939 ; 2014,952 2014,957 ; 2014,959 2014,962 ; 2014,969 2014,979 ; 2014,1016 2014,1021 ; 2014,1031 2014,1037 ; 2014,1040 2014,1047 ; 2014,1106 2014,1121 ; 2014,1176 2014,1182 ; 2014,1187 2014,1207 ; 2014,1269 2014,1274 ; 2014,1279 2014,1296 ; 2014,1314 2014,1320 ; 2014,1346 2014,1352 ; 2014,1356 2014,1374 ; 2014,1391 2014,1398 ; 2015,933 2015,939 ; 2015,952 2015,957 ; 2015,969 2015,978 ; 2015,1016 2015,1021 ; 2015,1030 2015,1046 ; 2015,1107 2015,1120 ; 2015,1177 2015,1178 ; 2015,1179 2015,1202 ; 2015,1269 2015,1274 ; 2015,1277 2015,1296 ; 2015,1314 2015,1320 ; 2015,1346 2015,1352 ; 2015,1355 2015,1373 ; 2015,1391 2015,1397 ; 2016,933 2016,939 ; 2016,952 2016,957 ; 2016,968 2016,977 ; 2016,1016 2016,1021 ; 2016,1030 2016,1046 ; 2016,1108 2016,1119 ; 2016,1167 2016,1171 ; 2016,1178 2016,1200 ; 2016,1269 2016,1274 ; 2016,1276 2016,1296 ; 2016,1313 2016,1320 ; 2016,1346 2016,1352 ; 2016,1354 2016,1373 ; 2016,1391 2016,1397 ; 2017,932 2017,938 ; 2017,952 2017,957 ; 2017,967 2017,977 ; 2017,1016 2017,1020 ; 2017,1029 2017,1047 ; 2017,1108 2017,1118 ; 2017,1166 2017,1171 ; 2017,1176 2017,1199 ; 2017,1269 2017,1274 ; 2017,1276 2017,1288 ; 2017,1289 2017,1295 ; 2017,1313 2017,1319 ; 2017,1346 2017,1352 ; 2017,1354 2017,1365 ; 2017,1366 2017,1373 ; 2017,1390 2017,1397 ; 2018,932 2018,938 ; 2018,952 2018,957 ; 2018,966 2018,978 ; 2018,1016 2018,1020 ; 2018,1029 2018,1046 ; 2018,1108 2018,1117 ; 2018,1166 2018,1171 ; 2018,1172 2018,1190 ; 2018,1192 2018,1198 ; 2018,1269 2018,1274 ; 2018,1276 2018,1286 ; 2018,1289 2018,1295 ; 2018,1298 2018,1303 ; 2018,1313 2018,1319 ; 2018,1347 2018,1352 ; 2018,1354 2018,1363 ; 2018,1366 2018,1373 ; 2018,1375 2018,1381 ; 2018,1390 2018,1396 ; 2019,932 2019,937 ; 2019,952 2019,957 ; 2019,965 2019,979 ; 2019,1016 2019,1020 ; 2019,1028 2019,1046 ; 2019,1107 2019,1116 ; 2019,1166 2019,1187 ; 2019,1192 2019,1198 ; 2019,1269 2019,1274 ; 2019,1277 2019,1283 ; 2019,1289 2019,1295 ; 2019,1299 2019,1306 ; 2019,1312 2019,1319 ; 2019,1347 2019,1352 ; 2019,1354 2019,1361 ; 2019,1366 2019,1373 ; 2019,1377 2019,1383 ; 2019,1390 2019,1396 ; 2020,932 2020,937 ; 2020,952 2020,957 ; 2020,963 2020,979 ; 2020,1016 2020,1019 ; 2020,1028 2020,1045 ; 2020,1106 2020,1116 ; 2020,1166 2020,1183 ; 2020,1192 2020,1198 ; 2020,1269 2020,1274 ; 2020,1279 2020,1280 ; 2020,1289 2020,1295 ; 2020,1297 2020,1306 ; 2020,1312 2020,1318 ; 2020,1347 2020,1352 ; 2020,1356 2020,1358 ; 2020,1366 2020,1373 ; 2020,1375 2020,1383 ; 2020,1389 2020,1396 ; 2021,932 2021,937 ; 2021,952 2021,957 ; 2021,961 2021,979 ; 2021,1017 2021,1019 ; 2021,1027 2021,1036 ; 2021,1037 2021,1045 ; 2021,1106 2021,1115 ; 2021,1166 2021,1178 ; 2021,1192 2021,1198 ; 2021,1269 2021,1274 ; 2021,1289 2021,1306 ; 2021,1312 2021,1318 ; 2021,1347 2021,1352 ; 2021,1366 2021,1383 ; 2021,1389 2021,1395 ; 2022,933 2022,938 ; 2022,952 2022,957 ; 2022,959 2022,978 ; 2022,1026 2022,1035 ; 2022,1037 2022,1044 ; 2022,1105 2022,1114 ; 2022,1167 2022,1174 ; 2022,1193 2022,1198 ; 2022,1270 2022,1274 ; 2022,1289 2022,1305 ; 2022,1311 2022,1317 ; 2022,1347 2022,1352 ; 2022,1366 2022,1382 ; 2022,1388 2022,1395 ; 2023,934 2023,939 ; 2023,952 2023,977 ; 2023,1026 2023,1034 ; 2023,1037 2023,1044 ; 2023,1104 2023,1113 ; 2023,1193 2023,1198 ; 2023,1270 2023,1274 ; 2023,1281 2023,1282 ; 2023,1288 2023,1303 ; 2023,1311 2023,1317 ; 2023,1347 2023,1352 ; 2023,1358 2023,1360 ; 2023,1365 2023,1380 ; 2023,1388 2023,1394 ; 2024,935 2024,940 ; 2024,953 2024,974 ; 2024,1025 2024,1033 ; 2024,1036 2024,1044 ; 2024,1103 2024,1112 ; 2024,1193 2024,1198 ; 2024,1270 2024,1274 ; 2024,1280 2024,1301 ; 2024,1310 2024,1317 ; 2024,1347 2024,1352 ; 2024,1358 2024,1378 ; 2024,1388 2024,1394 ; 2025,935 2025,940 ; 2025,953 2025,971 ; 2025,1023 2025,1032 ; 2025,1036 2025,1043 ; 2025,1102 2025,1111 ; 2025,1193 2025,1198 ; 2025,1270 2025,1274 ; 2025,1280 2025,1298 ; 2025,1310 2025,1316 ; 2025,1347 2025,1352 ; 2025,1357 2025,1376 ; 2025,1387 2025,1394 ; 2026,936 2026,941 ; 2026,953 2026,958 ; 2026,960 2026,967 ; 2026,1021 2026,1031 ; 2026,1035 2026,1043 ; 2026,1101 2026,1110 ; 2026,1193 2026,1198 ; 2026,1270 2026,1274 ; 2026,1279 2026,1295 ; 2026,1309 2026,1316 ; 2026,1347 2026,1352 ; 2026,1356 2026,1373 ; 2026,1387 2026,1393 ; 2027,936 2027,942 ; 2027,953 2027,957 ; 2027,960 2027,963 ; 2027,1021 2027,1031 ; 2027,1034 2027,1042 ; 2027,1100 2027,1109 ; 2027,1193 2027,1198 ; 2027,1270 2027,1274 ; 2027,1278 2027,1294 ; 2027,1299 2027,1300 ; 2027,1309 2027,1315 ; 2027,1347 2027,1352 ; 2027,1356 2027,1372 ; 2027,1376 2027,1377 ; 2027,1386 2027,1393 ; 2028,936 2028,942 ; 2028,953 2028,957 ; 2028,1021 2028,1032 ; 2028,1034 2028,1041 ; 2028,1100 2028,1108 ; 2028,1193 2028,1198 ; 2028,1270 2028,1274 ; 2028,1278 2028,1294 ; 2028,1298 2028,1301 ; 2028,1308 2028,1315 ; 2028,1347 2028,1352 ; 2028,1356 2028,1372 ; 2028,1375 2028,1378 ; 2028,1386 2028,1392 ; 2029,935 2029,941 ; 2029,953 2029,957 ; 2029,1021 2029,1041 ; 2029,1099 2029,1107 ; 2029,1193 2029,1198 ; 2029,1270 2029,1274 ; 2029,1279 2029,1287 ; 2029,1289 2029,1294 ; 2029,1297 2029,1302 ; 2029,1308 2029,1314 ; 2029,1347 2029,1352 ; 2029,1356 2029,1364 ; 2029,1366 2029,1371 ; 2029,1375 2029,1379 ; 2029,1385 2029,1392 ; 2030,932 2030,933 ; 2030,934 2030,941 ; 2030,953 2030,957 ; 2030,1021 2030,1040 ; 2030,1098 2030,1106 ; 2030,1193 2030,1198 ; 2030,1270 2030,1274 ; 2030,1280 2030,1283 ; 2030,1289 2030,1294 ; 2030,1298 2030,1303 ; 2030,1307 2030,1314 ; 2030,1348 2030,1352 ; 2030,1357 2030,1361 ; 2030,1366 2030,1371 ; 2030,1376 2030,1380 ; 2030,1384 2030,1391 ; 2031,930 2031,942 ; 2031,954 2031,957 ; 2031,1024 2031,1040 ; 2031,1097 2031,1105 ; 2031,1193 2031,1198 ; 2031,1270 2031,1274 ; 2031,1289 2031,1294 ; 2031,1299 2031,1304 ; 2031,1305 2031,1313 ; 2031,1348 2031,1352 ; 2031,1367 2031,1371 ; 2031,1376 2031,1382 ; 2031,1383 2031,1391 ; 2032,930 2032,944 ; 2032,1027 2032,1039 ; 2032,1096 2032,1104 ; 2032,1193 2032,1198 ; 2032,1272 2032,1274 ; 2032,1289 2032,1294 ; 2032,1300 2032,1313 ; 2032,1349 2032,1352 ; 2032,1367 2032,1371 ; 2032,1377 2032,1390 ; 2033,930 2033,947 ; 2033,1028 2033,1038 ; 2033,1095 2033,1103 ; 2033,1193 2033,1199 ; 2033,1289 2033,1294 ; 2033,1301 2033,1312 ; 2033,1367 2033,1372 ; 2033,1378 2033,1389 ; 2034,931 2034,950 ; 2034,1029 2034,1037 ; 2034,1094 2034,1102 ; 2034,1193 2034,1199 ; 2034,1290 2034,1294 ; 2034,1302 2034,1311 ; 2034,1367 2034,1372 ; 2034,1379 2034,1388 ; 2035,931 2035,954 ; 2035,1028 2035,1037 ; 2035,1093 2035,1101 ; 2035,1193 2035,1198 ; 2035,1290 2035,1294 ; 2035,1303 2035,1309 ; 2035,1367 2035,1372 ; 2035,1380 2035,1386 ; 2036,933 2036,957 ; 2036,1027 2036,1036 ; 2036,1092 2036,1100 ; 2036,1193 2036,1198 ; 2036,1290 2036,1294 ; 2036,1305 2036,1307 ; 2036,1367 2036,1372 ; 2036,1383 2036,1384 ; 2037,939 2037,961 ; 2037,1026 2037,1031 ; 2037,1032 2037,1035 ; 2037,1091 2037,1099 ; 2037,1193 2037,1198 ; 2037,1290 2037,1294 ; 2037,1367 2037,1372 ; 2038,942 2038,964 ; 2038,1025 2038,1029 ; 2038,1031 2038,1034 ; 2038,1091 2038,1097 ; 2038,1193 2038,1198 ; 2038,1290 2038,1294 ; 2038,1367 2038,1372 ; 2039,946 2039,970 ; 2039,979 2039,985 ; 2039,1025 2039,1028 ; 2039,1031 2039,1033 ; 2039,1090 2039,1096 ; 2039,1193 2039,1198 ; 2039,1290 2039,1294 ; 2039,1367 2039,1372 ; 2040,949 2040,983 ; 2040,1024 2040,1027 ; 2040,1030 2040,1032 ; 2040,1089 2040,1095 ; 2040,1193 2040,1198 ; 2040,1290 2040,1294 ; 2040,1368 2040,1372 ; 2041,952 2041,983 ; 2041,1023 2041,1026 ; 2041,1028 2041,1031 ; 2041,1088 2041,1093 ; 2041,1193 2041,1198 ; 2041,1290 2041,1294 ; 2041,1368 2041,1371 ; 2042,956 2042,983 ; 2042,1022 2042,1025 ; 2042,1027 2042,1030 ; 2042,1088 2042,1091 ; 2042,1193 2042,1198 ; 2042,1290 2042,1294 ; 2042,1368 2042,1371 ; 2043,960 2043,981 ; 2043,1020 2043,1024 ; 2043,1026 2043,1029 ; 2043,1193 2043,1198 ; 2043,1290 2043,1294 ; 2043,1368 2043,1371 ; 2044,966 2044,977 ; 2044,1019 2044,1023 ; 2044,1024 2044,1028 ; 2044,1193 2044,1198 ; 2044,1290 2044,1294 ; 2044,1367 2044,1371 ; 2045,1018 2045,1022 ; 2045,1023 2045,1027 ; 2045,1193 2045,1198 ; 2045,1290 2045,1293 ; 2045,1367 2045,1371 ; 2046,1017 2046,1026 ; 2046,1193 2046,1198 ; 2046,1292 2046,1293 ; 2046,1369 2046,1370 ; 2047,1016 2047,1024 ; 2047,1194 2047,1198 ; 2048,1014 2048,1023 ; 2048,1194 2048,1198 ; 2049,1013 2049,1021 ; 2049,1194 2049,1198 ; 2050,1013 2050,1020 ; 2050,1194 2050,1198 ; 2051,1014 2051,1017 ; 2051,1194 2051,1198 ; 2052,1194 2052,1197 ; 2053,1194 2053,1197
  Top Layer w10: 2425,2400 2425,2425

## Polygon pours and split planes (outlines as drawn)
GND on Bottom Layer "Bottom Layer-GND" (solid, pour order 22): 0,2425 2425,2425 2430,2420 2425,2415 2425,0 0,0
no net on Bottom Layer "Bottom Layer-No Net" (solid, pour order 20): 1410,3530
no net on Bottom Layer "Bottom Layer-No Net 1" (solid, pour order 18): 80,2515
GND on Top Layer "Top Layer-GND" (solid, pour order 24): 5,2425 2425,2425 2425,0 5,0 0,5 5,10